# Altium PCB PCB1.PcbDoc
Units mil, origin at the board's own origin, x right, y up, seen from the top; angles counter-clockwise.
Board outline 6000 x 4000 mil, 2 copper layers (Top Layer, Bottom Layer); 20 components, 43 nets, 143 pads, 0 vias.
Unrouted connection lines stored in the file: 76.
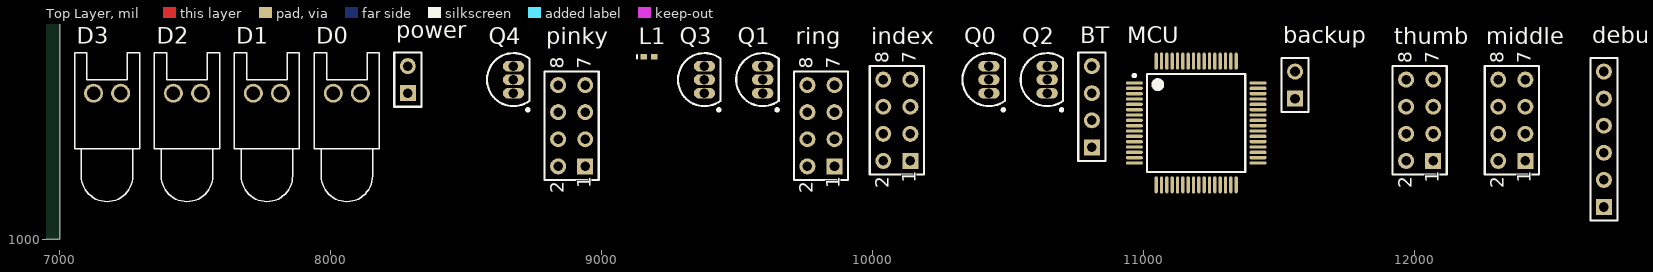
[diagram p0: Top Layer view]
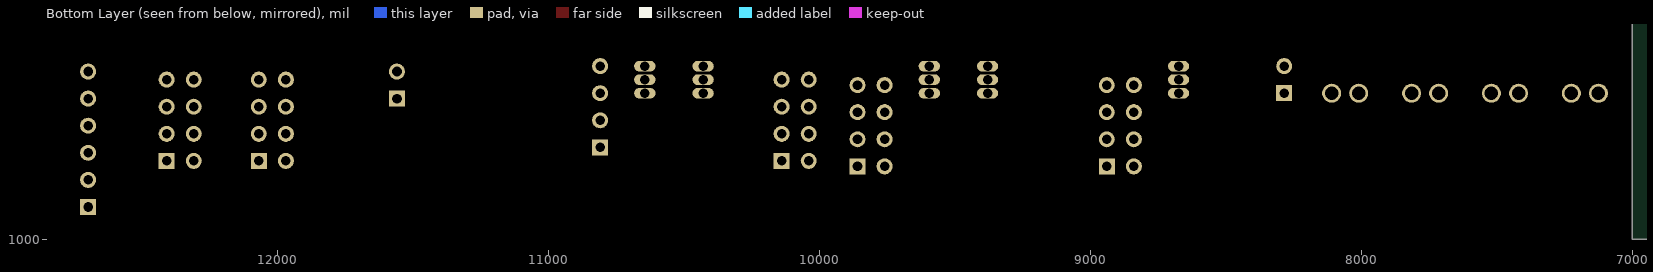
[diagram p1: Bottom Layer view, seen from below]

## Layer stack, top to bottom
Top Solder: solder mask 0.4, Solder Resist, Dk 3.5
Top Layer: signal copper 1.4
Dielectric 1: dielectric 12.6, FR-4, Dk 4.8
Bottom Layer: signal copper 1.4
Bottom Solder: solder mask 0.4, Solder Resist, Dk 3.5

## Board outline
1000,1000 7000,1000 7000,5000 1000,5000

## Design rules (kind name [scope] priority, off if disabled: settings)
Clearance [All] p1: gap=10 ignorepadtopadclearanceinfootprint=FALSE except(0: Arc-Hole Track-Hole SMDPad-Hole THPad-Hole Via-Hole Fill-Hole Poly-Hole Region-Hole Text-Hole)
PolygonConnect [All] p1: connectstyle=Relief reliefconductorwidth=10 reliefentries=4 polygonreliefangle="90 Angle" airgapwidth=10
RoomDefinition haptic_hands [InComponentClass('haptic_hands')] p1: confinementstyle=ConfineIn formatcopy=TRUE lockcomponents=FALSE outline 7045,1060 13185,1060 13185,1800 7045,1800
RoutingVias [All] p1: holewidth=28 width=50 viastyle="Through Hole" minholewidth=28 minwidth=50 maxholewidth=28 maxwidth=50
SolderMaskExpansion [All] p1: expansion=4 istentingtop=FALSE
Width [All] p1: maxlimit=10 minlimit=10 preferedwidth=10
30 further rules are at their usual default settings.

## Components (designator, comment, footprint, x,y, rotation, side; value= is the part's Value field where it differs from the comment)
backup "Header 2" HDR1X2 11560,1520 r90 top
BT "Header 4" HDR1X4 10810,1340 r90 top
D0 "LED0" LED-0 8060,1540 r0 top
D1 "LED0" LED-0 7765,1540 r0 top
D2 "LED0" LED-0 7470,1540 r0 top
D3 "LED0" LED-0 7175,1540 r0 top
debugging "Header 6" HDR1X6 12700,1120 r90 top
index "Header 4X2" HDR2X4 10140,1290 r90 top
L1 "Inductor" 0402-A 9175,1675 r0 top value=100uH
MCU "STM32F411RET6" STM-LQFP64_L 11195,1430 r0 top
middle "Header 4X2" HDR2X4 12410,1290 r90 top
pinky "Header 4X2" HDR2X4 8940,1270 r90 top
power "Header 2" HDR1X2 8285,1540 r90 top
Q0 "2N3904" TO-92A 10430,1590 r0 top
Q1 "2N3904" TO-92A 9595,1590 r0 top
Q2 "2N3904" TO-92A 10645,1590 r0 top
Q3 "2N3904" TO-92A 9380,1590 r0 top
Q4 "2N3904" TO-92A 8675,1590 r0 top
ring "Header 4X2" HDR2X4 9860,1270 r90 top
thumb "Header 4X2" HDR2X4 12070,1290 r90 top

## Footprints (in the part's own frame and the unit in brackets; to place one, negate y for a bottom-side part, rotate by r counter-clockwise, add the part's x,y. Pads: shape width x height; smd on the part's side, far side on the other; paste and mask are expansions set on the pad)
0402-A [mm] "Chip Inductor, Body 1.0x0.5mm, IPC High Density"
  rect 0.6x0.5 smd: 1(-0.5,0) 2(0.5,0)
  silkscreen extent -1.1,-0.15 -1.1,0.15, body extent -0.55,-0.3 0.55,0.3, height 0.55
HDR1X2 [mm] "Connector; Header; 2 Position"
  rect 1.5x1.5 hole 0.9: 1(0,0)
  round 1.5 hole 0.9: 2(2.54,0)
  silkscreen extent -1.27,-1.27 3.81,1.27
HDR1X4 [mm] "Connector; Header; 4 Position"
  rect 1.5x1.5 hole 0.9: 1(0,0)
  round 1.5 hole 0.9: 2(2.54,0) 3(5.08,0) 4(7.62,0)
  silkscreen extent -1.27,-1.27 8.89,1.27
HDR1X6 [mm] "Connector; Header; 6 Position"
  rect 1.5x1.5 hole 0.9: 1(0,0)
  round 1.5 hole 0.9: 2(2.54,0) 3(5.08,0) 4(7.62,0) 5(10.16,0) 6(12.7,0)
  silkscreen extent -1.27,-1.27 13.97,1.27
HDR2X4 [mm] "Connector; Header; 4x2 Position"
  rect 1.5x1.5 hole 0.9: 1(0,0)
  round 1.5 hole 0.9: 2(0,2.54) 3(2.54,0) 4(2.54,2.54) 5(5.08,0) 6(5.08,2.54) 7(7.62,0) 8(7.62,2.54)
  silkscreen extent -1.27,-1.27 8.89,3.81
LED-0 [mil] "LED; 2 Leads"
  round 70 hole 50: 1(50,0) 2(-50,0)
  silkscreen extent -120,-400 120,150
STM-LQFP64_L [mm] "QFP, 64-Leads, Body 10x10mm, Pitch 0.5mm, IPC High Density"
  oval 1.6x0.3 smd: 1(-5.8,3.75) 2(-5.8,3.25) 3(-5.8,2.75) 4(-5.8,2.25) 5(-5.8,1.75) 6(-5.8,1.25) 7(-5.8,0.75) 8(-5.8,0.25) 9(-5.8,-0.25) 10(-5.8,-0.75) 11(-5.8,-1.25) 12(-5.8,-1.75) 13(-5.8,-2.25) 14(-5.8,-2.75) 15(-5.8,-3.25) 16(-5.8,-3.75) 33(5.8,-3.75) 34(5.8,-3.25) 35(5.8,-2.75) 36(5.8,-2.25) 37(5.8,-1.75) 38(5.8,-1.25) 39(5.8,-0.75) 40(5.8,-0.25) 41(5.8,0.25) 42(5.8,0.75) 43(5.8,1.25) 44(5.8,1.75) 45(5.8,2.25) 46(5.8,2.75) 47(5.8,3.25) 48(5.8,3.75)
  oval 0.3x1.6 smd: 17(-3.75,-5.8) 18(-3.25,-5.8) 19(-2.75,-5.8) 20(-2.25,-5.8) 21(-1.75,-5.8) 22(-1.25,-5.8) 23(-0.75,-5.8) 24(-0.25,-5.8) 25(0.25,-5.8) 26(0.75,-5.8) 27(1.25,-5.8) 28(1.75,-5.8) 29(2.25,-5.8) 30(2.75,-5.8) 31(3.25,-5.8) 32(3.75,-5.8) 49(3.75,5.8) 50(3.25,5.8) 51(2.75,5.8) 52(2.25,5.8) 53(1.75,5.8) 54(1.25,5.8) 55(0.75,5.8) 56(0.25,5.8) 57(-0.25,5.8) 58(-0.75,5.8) 59(-1.25,5.8) 60(-1.75,5.8) 61(-2.25,5.8) 62(-2.75,5.8) 63(-3.25,5.8) 64(-3.75,5.8)
  silkscreen extent -5.92,-4.6 4.6,4.6, body extent -5,-5 5,5, height 1.6
TO-92A [mm] "TO, Flat Index; 3 In-Line, Axial Leads; Body Dia. 4.5mm; Leads 0.51 x 0.48 mm (max)"
  oval 2x1 hole 0.9: 1(0,-1.27) 2(0,0) 3(0,1.27)
  silkscreen extent -2.48,-2.95 1.5,2.48, body extent -2.48,-2.5 1.5,2.5, height 6.86

## Part data
backup power: "Header, 2-Pin", LatestRevisionDate=17-Jul-2002, LatestRevisionNote="Re-released for DXP Platform.", Publisher="Altium Limited"
BT: "Header, 4-Pin", LatestRevisionDate=17-Jul-2002, LatestRevisionNote="Re-released for DXP Platform.", Publisher="Altium Limited"
D0 D1 D2 D3: "Typical INFRARED GaAs LED", LatestRevisionDate=08-Jul-2005, LatestRevisionNote="Mech Layer 1 removed.", PackageDescription="LED; 2 Leads", PackageReference=LED-0, Published=8-Jun-2000, Publisher="Altium Limited"
debugging: "Header, 6-Pin", LatestRevisionDate=17-Jul-2002, LatestRevisionNote="Re-released for DXP Platform.", Publisher="Altium Limited"
index middle pinky ring thumb: "Header, 4-Pin, Dual row", LatestRevisionDate=17-Jul-2002, LatestRevisionNote="Re-released for DXP Platform.", Publisher="Altium Limited"
MCU: library part CMP-0243-00169-1, "ARM Cortex-M4 32-bit MCU+FPU, 512 KB Flash, 128 KB RAM, 50 I/Os, 64-Pin LQFP, -40 to 85 degC, Tray", I/Os (High Current)=50, Operating Frequency(F) (Processor speed) (MHz)=100, Package Description=LQFP64, Package Reference="64-Pin Low-profile Quad Flat Package, Body 10 x 10 mm, Pitch 0.5 mm", Supply Voltage(Vcc) min (V)=1.7, ComponentLink1Description="Manufacturer URL", ComponentLink1URL=http://www.st.com/, ComponentLink2Description=Datasheet, ComponentLink2URL=http://www.st.com/st-web-ui/static/active/en/resource/technical/document/datasheet/DM00115249.pdf, Core="ARM Cortex-M4", DatasheetVersion="Rev. 6", FLASH Size (Prog) (kB)=512, Internal RAM Size (kB)=128, Mounting Technology="Surface Mount", Packing=Tray
Q0 Q1 Q2 Q3 Q4: "NPN General Purpose Amplifier", ComponentLink1Description="Manufacturer Link", ComponentLink1URL=http://www.fairchildsemi.com/, ComponentLink2Description=Datasheet, ComponentLink2URL=http://www.fairchildsemi.com/ds/2N%2F2N3904.pdf, DatasheetVersion=1997, LatestRevisionDate=15-Jan-2003, LatestRevisionNote="PCB Footprint 'BCY-W3/D4.7' replaced", PackageDescription="TO, Flat Index; 3 In-Line, Axial Leads; Body Dia. 4.5mm; Leads 0.51 x 0.48 mm (max)", PackageReference=TO-92A, PackageVersion=Sep-1998, Published=8-Jun-2000, Publisher="Altium Limited"
L1: Code_IEC=1005, Code_JEITA=0402, LatestRevisionDate=29-May-2009, LatestRevisionNote="IPC-7351 Footprint Added.", PackageDescription="Chip Inductor", PackageReference=0402-A, Published=8-Jun-2000, Publisher="Altium Limited"

## Nets (pads, with @x,y where several pads share a name; then routed paths per layer and width w, separated by ;. In a path a pad name is that pad's centre, name@x,y a point inside that pad or via, vN(x,y) a via of type N, cw(c..) or ccw(c..) an arc to the next point about the centre after c; other vN are vias at no path point)
3.3V: index.4 index.8 middle.4 middle.8 pinky.4 pinky.8 ring.4 ring.8 thumb.4 thumb.8
7.2V: power.1
+5: BT.4 index.3 L1.1 MCU.1 MCU.19 MCU.32 MCU.48 MCU.64 middle.3 pinky.3 ring.3 thumb.3
AGND: BT.3 D0.2 D1.2 D2.2 D3.2 debugging.6 index.5 index.6 MCU.12 MCU.18 MCU.31 MCU.47 MCU.63 middle.5 middle.6 pinky.5 pinky.6 power.2 Q0.1 Q1.1 Q2.1 Q3.1 Q4.1 ring.5 ring.6 thumb.5 thumb.6
AVDD: L1.2 MCU.13
BOOT0: debugging.1 MCU.60
NetC15_1: 
NetC26_2: MCU.30
NetD0_1: D0.1
NetD1_1: D1.1
NetD2_1: D2.1
NetD3_1: D3.1
Netindex_7: index.7 Q1.3
Netmiddle_7: middle.7 Q2.3
Netpinky_7: pinky.7 Q4.3
NetQ0_3: Q0.3 thumb.7
NetQ3_3: Q3.3 ring.7
NRST: debugging.4 MCU.7
PA0: debugging.5 MCU.14
PA1: backup.1 MCU.15
PA5_pot0: MCU.21 thumb.2
PA6_pot1: index.2 MCU.22
PA7_pot2: MCU.23 middle.2
PA8_vib4: MCU.41 Q4.2
PA9_vib3: MCU.42 Q3.2
PA10_vib2: MCU.43 Q2.2
PA11_vib1: MCU.44 Q1.2
PA12_vib0: MCU.45 Q0.2
PA15_servo1: index.1 MCU.50
PB0_pot3: MCU.26 ring.2
PB1_pot4: MCU.27 pinky.2
PB3_servo0: MCU.55 thumb.1
PB6_servo3: MCU.58 ring.1
PB7_servo4: MCU.59 pinky.1
PB10_servo2: MCU.29 middle.1
PC1: MCU.9
PC2: MCU.10
PC3: backup.2 MCU.11
PC6_USART6_TX: BT.1 MCU.37
PC7_USART6_RX: BT.2 MCU.38
PC13_button: MCU.2
SWCLK: debugging.2 MCU.49
SWDIO: debugging.3 MCU.46
pads on no net: MCU.3 MCU.4 MCU.5 MCU.6 MCU.8 MCU.16 MCU.17 MCU.20 MCU.24 MCU.25 MCU.28 MCU.33 MCU.34 MCU.35 MCU.36 MCU.39 MCU.40 MCU.51 MCU.52 MCU.53 MCU.54 MCU.56 MCU.57 MCU.61 MCU.62

## Text inside footprints (layer, text, board x,y; h text height)
index: Top Overlay "2" at 10060,1190 h50 r90; Top Overlay "1" at 10160,1210 h50 r90; Top Overlay "7" at 10160,1650 h50 r90; Top Overlay "8" at 10060,1650 h50 r90
middle: Top Overlay "2" at 12330,1190 h50 r90; Top Overlay "1" at 12430,1210 h50 r90; Top Overlay "7" at 12430,1650 h50 r90; Top Overlay "8" at 12330,1650 h50 r90
pinky: Top Overlay "2" at 8860,1170 h50 r90; Top Overlay "1" at 8960,1190 h50 r90; Top Overlay "7" at 8960,1630 h50 r90; Top Overlay "8" at 8860,1630 h50 r90
ring: Top Overlay "2" at 9780,1170 h50 r90; Top Overlay "1" at 9880,1190 h50 r90; Top Overlay "7" at 9880,1630 h50 r90; Top Overlay "8" at 9780,1630 h50 r90
thumb: Top Overlay "2" at 11990,1190 h50 r90; Top Overlay "1" at 12090,1210 h50 r90; Top Overlay "7" at 12090,1650 h50 r90; Top Overlay "8" at 11990,1650 h50 r90